# EAGLE board motor ic (EAGLE 6.1)
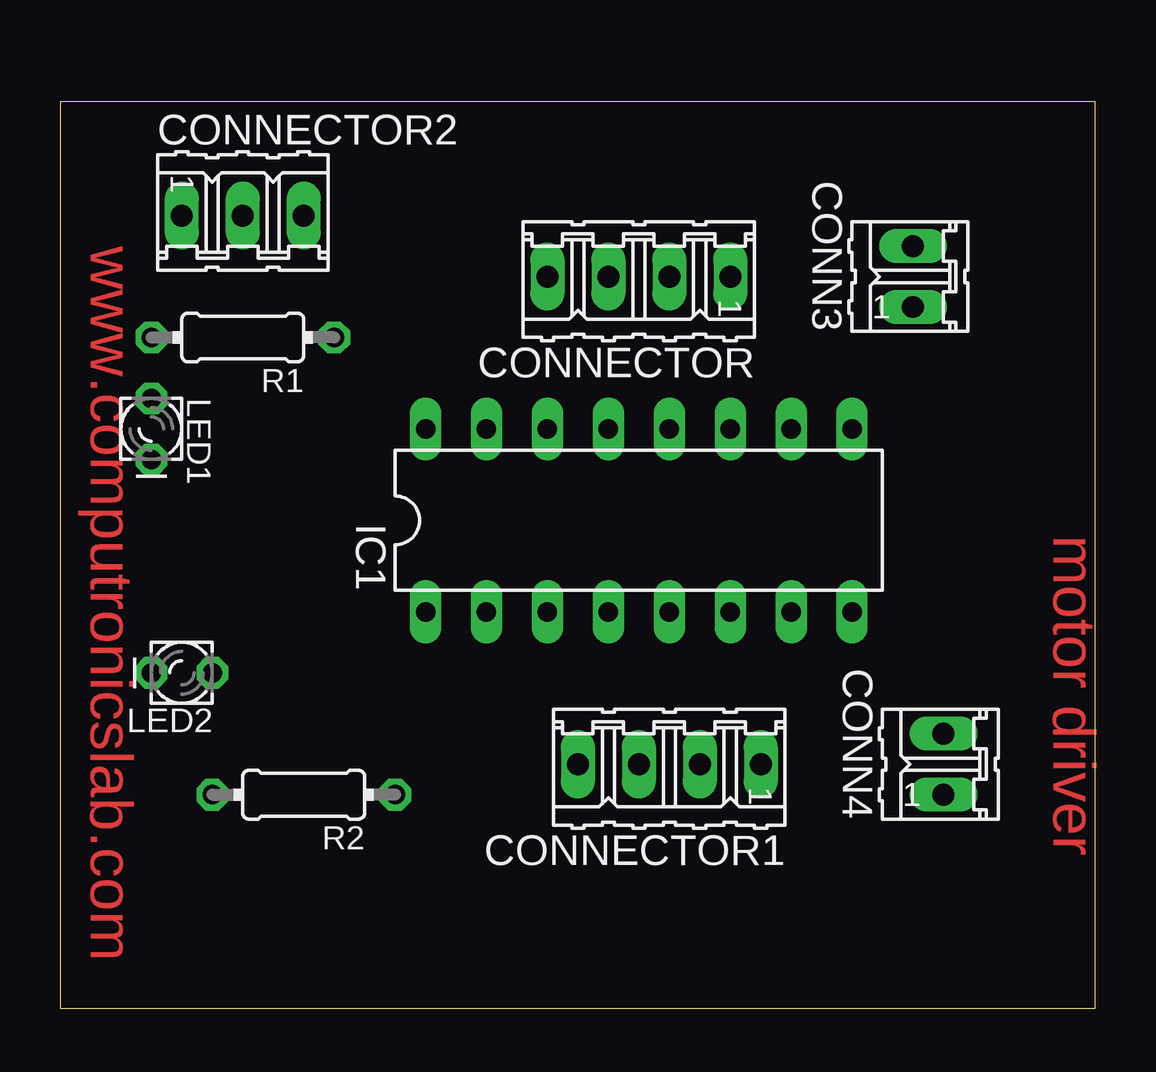
[diagram p0: board, top side]
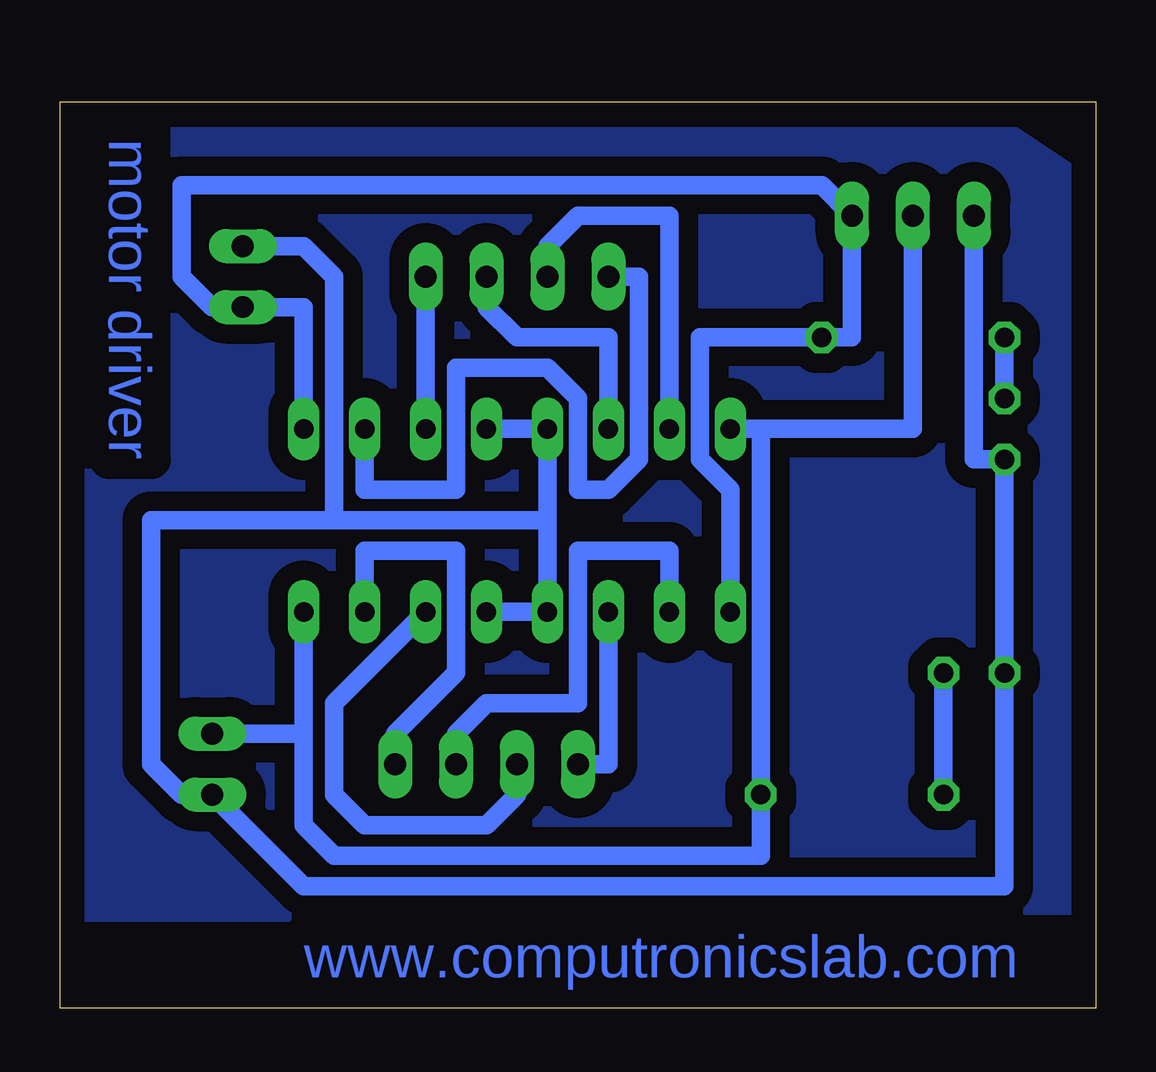
[diagram p1: board, bottom side, seen from below]

Size 43.16 x 37.77 mm. Coordinates in mm from the lower left corner, seen from the top.
Outline: 0,0 43.16,0 43.16,37.77 0,37.77 0,0
Copper layers (1*16): Top 0.035mm / dielectric 1.5mm / Bottom 0.035mm
Design rules: minimum track width 30mil, minimum drill 24mil, track to track 8mil, track to pad 8mil, pad to pad 8mil, via to via 8mil, smd to smd 8mil, copper to edge 40mil, drill to drill 8mil, minimum pad ring 10mil, minimum via ring 8mil, stop-mask expansion 4mil, vias tented up to drill 0mil, thermal gap 10mil

## Footprints (pad centres in the part's own frame; a part is rotated, then mirrored left to right if it is on the bottom)
02P = drill 0.914 long: 1 -1.27,0; 2 1.27,0
04P = drill 0.914 long: 1 -3.81,0; 2 -1.27,0; 3 1.27,0; 4 3.81,0
03P = drill 0.914 long: 1 -2.54,0; 2 0,0; 3 2.54,0
DIL16 = drill 0.813 long: 1 -8.89,-3.81; 2 -6.35,-3.81; 3 -3.81,-3.81; 4 -1.27,-3.81; 5 1.27,-3.81; 6 3.81,-3.81; 7 6.35,-3.81; 8 8.89,-3.81; 9 8.89,3.81; 10 6.35,3.81; 11 3.81,3.81; 12 1.27,3.81; 13 -1.27,3.81; 14 -3.81,3.81; 15 -6.35,3.81; 16 -8.89,3.81
LED_LD260 = drill 0.813 octagon: A -1.27,0; K 1.27,0
0204/7 = drill 0.813 octagon: 1 -3.81,0; 2 3.81,0

## Placement (x,y rotation side)
CONN3  2 pin  [02P]  35.56,30.48 90 top
CONN4  2 pin  [02P]  36.83,10.16 90 top
CONNECTOR  4 pin  [04P]  24.13,30.48 180 top
CONNECTOR1  4 pin  [04P]  25.4,10.16 180 top
CONNECTOR2  3 pin  [03P]  7.62,33.02 0 top
IC1  L293D  [DIL16]  24.13,20.32 0 top
LED1  5mm  [LED_LD260]  3.81,24.13 270 top
LED2  5mm  [LED_LD260]  5.08,13.97 180 top
R1  330E  [0204/7]  7.62,27.94 180 top
R2  330E  [0204/7]  10.16,8.89 180 top

## Library data of the parts
CONN3 CONN4 CONNECTOR CONNECTOR1 CONNECTOR2 = con-amp-quick; OC_FARNELL: unknown; OC_NEWARK: unknown
IC1 = st-microelectronics; MPN: L293D; OC_FARNELL: 9589619; OC_NEWARK: 56P8249
LED1 LED2 = eagle-ltspice; SPICEMODEL: NONE; SPICEPREFIX: D; SPICETYPE: diode
R1 R2 = rcl

## Nets
N$1: LED1.A R1.2
N$2: LED2.A R2.2
N$4: CONNECTOR1.2 IC1.2
N$5: CONNECTOR1.4 IC1.3
N$6: CONNECTOR1.3 IC1.6
N$7: CONNECTOR1.1 IC1.7
N$8: CONNECTOR.3 IC1.15
N$9: CONNECTOR.4 IC1.10
N$10: CONNECTOR.2 IC1.14
N$11: CONNECTOR.1 IC1.11
N$12: CONN3.2 CONN4.1 CONNECTOR2.1 IC1.4 IC1.5 IC1.12 IC1.13 LED1.K LED2.K
N$13: CONN3.1 CONNECTOR2.3 IC1.1 IC1.9 R1.1
N$14: CONN4.2 CONNECTOR2.2 IC1.8 IC1.16 R2.1

## Tracks (layer width: path | path; a pad name or v marks a point on that pad's centre or on a via)
N$1
  Bottom 0.762: R1.2 LED1.A
N$2
  Bottom 0.762: LED2.A R2.2
N$3
  pour Bottom (isolate 0.813): 3.81,3.81 3.81,0 0,3.81 0,34.29 3.81,36.83 39.37,36.83 43.18,34.29 43.18,3.81
N$4
  Bottom 0.762: IC1.2 17.78,19.05 21.59,19.05 21.59,12.7 25.4,12.7 26.67,11.43 CONNECTOR1.2
N$5
  Bottom 0.762: IC1.3 20.32,10.16 CONNECTOR1.4
N$6
  Bottom 0.762: IC1.6 31.75,12.7 31.75,8.89 30.48,7.62 25.4,7.62 24.13,8.89 CONNECTOR1.3
N$7
  Bottom 0.762: IC1.7 30.48,19.05 26.67,19.05 26.67,13.97 29.21,11.43 CONNECTOR1.1
N$8
  Bottom 0.762: IC1.15 17.78,33.02 21.59,33.02 22.86,31.75 CONNECTOR.3
N$9
  Bottom 0.762: IC1.10 30.48,21.59 26.67,21.59 26.67,26.67 22.86,26.67 21.59,25.4 21.59,21.59 20.32,21.59 19.05,22.86 19.05,30.48 CONNECTOR.4
N$10
  Bottom 0.762: IC1.14 20.32,27.94 24.13,27.94 25.4,29.21 CONNECTOR.2
N$11
  Bottom 0.762: CONNECTOR.1 IC1.11
N$12
  Bottom 0.762: CONNECTOR2.1 5.08,22.86 LED1.K LED2.K 3.81,5.08 33.02,5.08 CONN4.1 38.1,8.89 39.37,10.16 39.37,20.32 31.75,20.32 | IC1.4 IC1.5 IC1.4 | IC1.12 IC1.13 22.86,20.32 | CONN3.2 33.02,31.75 31.75,30.48 31.75,20.32 | 22.86,20.32 31.75,20.32 | 22.86,20.32 IC1.4 | IC1.4 22.86,20.32
N$13
  Bottom 0.762: IC1.9 33.02,29.21 CONN3.1 36.83,29.21 38.1,30.48 38.1,34.29 11.43,34.29 CONNECTOR2.3 10.16,27.94 R1.1 16.51,27.94 16.51,22.86 15.24,21.59 IC1.1
N$14
  Bottom 0.762: 33.02,11.43 IC1.8 | CONN4.2 33.02,11.43 | 13.97,24.13 R2.1 13.97,6.35 31.75,6.35 33.02,7.62 33.02,11.43 | IC1.16 13.97,24.13 | CONNECTOR2.2 7.62,24.13 13.97,24.13

## Text on the board
Top: www.computronicslab.com | motor driver
Bottom: motor driver | www.computronicslab.com